# Altium PCB BALL_DROPPER_REV3.PcbDoc (part 2 of 2)
Units mil, origin at the board's own origin, x right, y up, seen from the top; angles counter-clockwise.
Board outline 3260 x 1965 mil, 4 copper layers (Top Layer, Power, GND, Bottom Layer), stack 30.634 mil thick; 128 components, 129 nets, 645 pads, 299 vias.
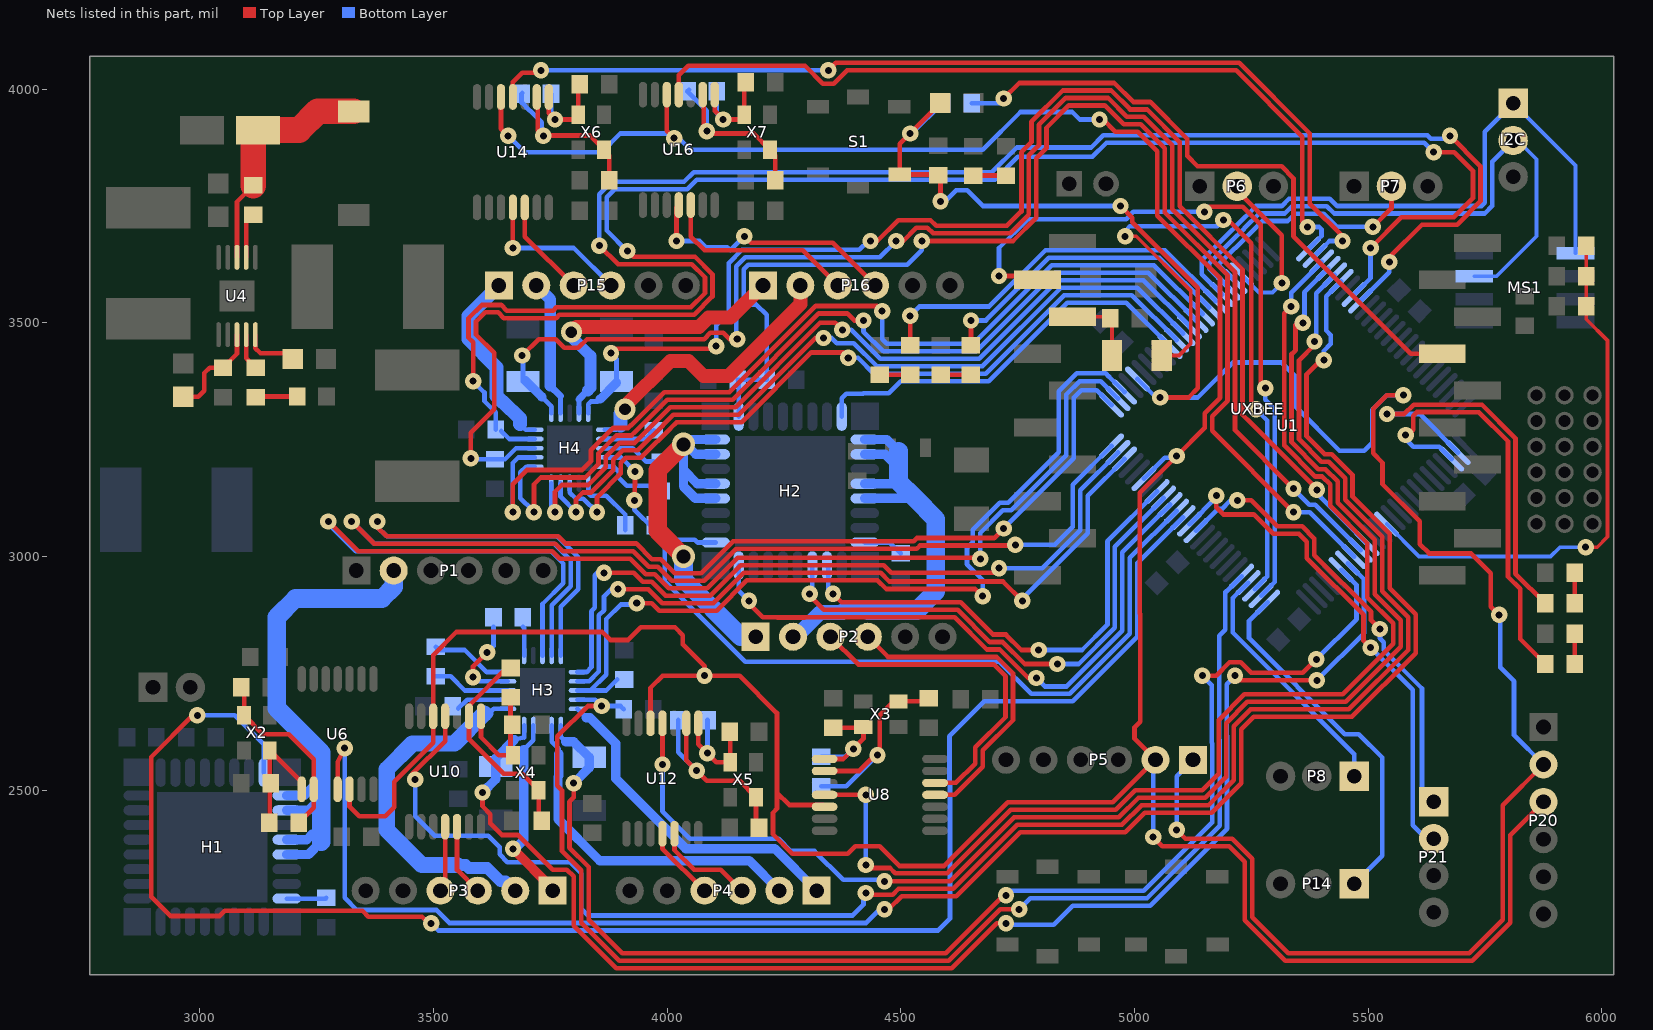
[diagram p4: the nets of this part, all layers, seen from the top]

## Via types
v1: diameter 35, hole 15, Top Layer to Bottom Layer, tented both sides, 211 vias
v2: diameter 19.68, hole 7.87, Top Layer to Bottom Layer, tented both sides, 60 vias
v3: diameter 45, hole 25, Top Layer to Bottom Layer, tented both sides, 9 vias
v4: diameter 60, hole 40, Top Layer to Bottom Layer, tented both sides, 8 vias
v5: diameter 55, hole 35, Top Layer to Bottom Layer, tented both sides, 7 vias
v6: diameter 50, hole 30, Top Layer to Bottom Layer, tented both sides, 2 vias
v7: diameter 135, hole 115, Top Layer to Bottom Layer, 2 vias

## Nets (pads, with @x,y where several pads share a name; then routed paths per layer and width w, separated by ;. In a path a pad name is that pad's centre, name@x,y a point inside that pad or via, vN(x,y) a via of type N, cw(c..) or ccw(c..) an arc to the next point about the centre after c; other vN are vias at no path point) (continued)
MOT1_OUT2: H1.29 H1.30 H1.32 H1.33 P1.2 | length 1145.8
  Bottom Layer w20: H1.33@3186.14,2362.56 3232.56,2362.56 3260,2390 ; H1.32@3186.14,2394.06 3229.06,2394.06 3242.5,2407.5 ; H1.30@3186.14,2457.05 3232.05,2457.05 3260,2485 ; H1.29@3186.14,2488.54 3223.54,2488.54 3255,2520
  Bottom Layer w40: 3260,2390 3260,2485 3260,2580 3165,2675 3165,2870 3205,2910 3390,2910 3415,2935 P1.2@3415,2970
MOT1_SS: U1.56 U6.4 | length 3975.7
  Top Layer w10: U6.4@3295,2501.89 3295,2560 v1(3310,2590) ; v1(4465,2245) 4473.63,2245 4501.63,2273 4618.51,2273 4755.51,2410 4979.69,2410 5021.69,2452 5164.88,2452 5228,2515.12 5228,2630.12 5254.88,2657 5465.19,2657 5601.5,2793.31 5601.5,2876.69 5546,2932.19 5546,3048.75 5466.5,3128.25 5466.5,3174.19 5421.69,3219 5406.51,3219 5368,3257.51 5368,3390 5398,3420 v1(5405,3420)
  Bottom Layer w10: v1(3310,2590) 3310,2270 3336.5,2243.5 3506.8,2243.5 3534.3,2216 4426,2216 4455,2245 v1(4465,2245) ; v1(5405,3420) 5405,3439.7 5420,3454.7 5420,3473.8 5410.24,3483.57 5410.24,3556.74 U1.56@5442.02,3588.52
MOT1_TRI_EN: H1.27 U1.14 | length 3598.1
  Top Layer w10: v1(2995,2660) 2985,2660 2896,2571 2896,2271.63 2936.63,2231 3042.75,2231 3053.75,2242 3348.25,2242 3360.75,2229.5 3475.5,2229.5 3490,2215 v1(3495,2215)
  Bottom Layer w10: v1(2995,2660) 3075,2660 3136.93,2598.07 H1.27@3136.93,2537.76 ; v1(3495,2215) 3510,2200 4580,2200 4605,2225 4605,2513.88 4604,2514.88 4604,2615.12 4678.88,2690 4868.14,2690 5006,2827.86 5006,2986 5103.25,3083.25 U1.14@5103.78,3083.25
MOT2_A: H2.11 U1.15 | length 1646.1
  Bottom Layer w10: H2.11@4103.94,3029.76 4065.24,3029.76 4059,3036 4006,3036 3995,3025 3995,2947.04 4167.04,2775 4710,2775 4779,2706 4861.51,2706 4990,2834.49 4990,2997.3 U1.15@5089.86,3097.17
MOT2_B: H2.3 U1.18 | length 1053.6
  Top Layer w10: v1(4355,2920) 4373,2902 4628.25,2902 4697.25,2833 4724.88,2833 4757.88,2800 v1(4795,2800)
  Bottom Layer w10: H2.3@4342.13,2980.55 4345,2977.68 4345,2930 v1(4355,2920) ; v1(4795,2800) 4887.63,2800 4942,2854.37 4942,3032.82 U1.18@5048.1,3138.92
MOT2_EN: H2.4 U1.17 | length 1132.9
  Top Layer w10: v1(4305,2920) 4305,2916 4335,2886 4621.63,2886 4690.63,2817 4718.25,2817 4765.25,2770 v1(4835,2770)
  Bottom Layer w10: v1(4305,2920) 4310.63,2925.63 H2.4@4310.63,2980.55 ; v1(4835,2770) 4880.25,2770 4958,2847.75 4958,3020.98 U1.17@5062.02,3125
MOT2_ENCA: P2.3 U8.12 | length 726.4
  Top Layer w10: P2.3@4349.29,2828.31 4408.6,2769 4698.37,2769 4724,2743.37 4724,2656.63 4659,2591.63 4659,2556.63 4617.96,2515.59 U8.12@4573.11,2515.59
MOT2_ENCB: P2.4 U8.11 | length 696.8
  Top Layer w10: P2.4@4429.29,2828.31 4472.6,2785 4705,2785 4740,2750 4740,2650 4675,2585 4675,2550 4615,2490 U8.11@4573.11,2490
MOT2_FB: C22.2 H2.20 R7.2 U1.93 | length 2694.6
  Top Layer w10: v1(4545,3675) 4740,3675 4790,3725 4790,3851.7 4811.5,3873.2 4811.5,3916.8 4859.69,3965 4936.62,3965 4977.12,3924.5 5013.38,3924.5 5064.5,3873.38 5064.5,3736.01 5199,3601.51 5199,3333.19 5166,3300.19 5166,3269 v1(5340,3095)
  Bottom Layer w10: H2.20@4153.15,3299.45 4153.15,3375.95 R7.2@4150.79,3378.31 C22.2@4212.8,3378.31 4212.8,3517.2 4191,3539 4170.44,3539 4164,3545.44 4164,3614.56 4173.44,3624 4514,3624 4545,3655 v1(4545,3675) ; v1(5340,3095) 5374.59,3095 U1.93@5469.86,2999.73
MOT2_FS: H2.9 U1.16 | length 1324.4
  Top Layer w10: v1(4175,2905) 4175,2900 4205,2870 4235.55,2870 4236.25,2869.31 4252.31,2869.31 4293.75,2869.31 4294.45,2870 4615,2870 4684,2801 4711.63,2801 4772.63,2740 v1(4790,2740)
  Bottom Layer w10: H2.9@4153.15,2980.55 4153.15,2926.85 v1(4175,2905) ; v1(4790,2740) 4808,2722 4854.88,2722 4974,2841.12 4974,3009 5042.5,3077.5 5042.5,3077.64 U1.16@5075.94,3111.08
MOT2_OUT1: H2.14 H2.15 H2.17 H2.18 P2.1 | length 934.4
  Top Layer w40: v6(4035,3000) 3980,3055 3980,3185 v6(4035,3240)
  Bottom Layer w20: v6@4044.76,3250.24 H2.18@4103.94,3250.24 ; H2.14@4103.94,3124.25 4060.75,3124.25 4035,3150 4035,3185 ; H2.15@4103.94,3155.75 4064.25,3155.75 4035,3185 ; H2.17@4103.94,3218.74 4061.26,3218.74 4035,3245 v6(4035,3240) 4035,3185
  Bottom Layer w40: v6(4035,3000) 4035,2950.88 4157.58,2828.31 P2.1@4189.29,2828.31
MOT2_OUT2: H2.29 H2.30 H2.32 H2.33 P2.2 | length 1021.7
  Bottom Layer w20: H2.33@4422.83,3124.25 4530.75,3124.25 ; H2.32@4422.83,3155.75 4490.75,3155.75 ; H2.30@4422.83,3218.74 4466.26,3218.74 4495,3190 ; H2.29@4422.83,3250.24 4469.76,3250.24 4495,3225
  Bottom Layer w32: P2.2@4269.29,2828.31 4275.75,2828.31 4327.75,2880.31 4370.83,2880.31 4371.14,2880 4375,2880 4379.31,2884.31
  Bottom Layer w35: 4379.31,2884.31 4430,2884.31
  Bottom Layer w40: 4430,2884.31 4534.31,2884.31 4575,2925 4575,3080 4530.75,3124.25 4495,3160 4495,3190 4495,3225
MOT2_SS: U1.53 U8.4 | length 2600.8
  Top Layer w10: U8.4@4336.89,2490 v1(4425,2490) ; v1(4425,2340) 4431.5,2333.5 4476.81,2333.5 4488.31,2322 4599.63,2322 4735.63,2458 4959.81,2458 5001.81,2500 5145,2500 5180,2535 5180,2650 5235,2705 5445.31,2705 5553.5,2813.2 5553.5,2856.8 5498,2912.3 5498,3028.86 5418.5,3108.36 5418.5,3154.3 5401.81,3171 5386.63,3171 5320,3237.63 5320,3520 v1(5335,3535)
  Bottom Layer w10: v1(4425,2340) v1(4425,2490) ; v1(5335,3535) 5335,3564.7 5400.27,3629.96 U1.53@5400.27,3630.28
MOT2_TRI_EN: H2.27 U1.35 | length 865
  Bottom Layer w10: H2.27@4373.62,3299.45 4373.62,3338.62 4383.5,3348.5 4419.19,3348.5 4419.69,3349 4474,3349 4500,3375 4687.88,3375 4855.88,3543 4982.27,3543 U1.35@5075.94,3449.33
MOT3_A: H3.4 U1.25 | length 2574.7
  Top Layer w10: v1(3325,3075) 3373,3027 3760.63,3027 3776.63,3011 3927.83,3011 3960.83,2978 3979.88,2978 4009.88,2948 4079.17,2948 4147.71,3016.54 4534.17,3016.54 4541.13,3023.5 4743.5,3023.5 v1(4745,3025)
  Bottom Layer w10: v1(3325,3075) 3373,3027 3758.61,3027 3794,2991.61 3794,2936.37 3753.03,2895.4 H3.4@3753.03,2788.15 ; v1(4745,3025) 4829.75,3025 4868,3063.25 4868,3153.69 U1.25@4950.67,3236.36
MOT3_B: H3.5 U1.26 | length 2569.8
  Top Layer w10: v1(3380,3075) 3380,3063 3400,3043 3767.25,3043 3782.31,3027.94 3933.52,3027.94 3967.46,2994 3986.51,2994 4016.51,2964 4072.54,2964 4141.08,3032.54 4527.54,3032.54 4534.5,3039.5 4699.5,3039.5 v1(4720,3060)
  Bottom Layer w10: v1(3380,3075) 3380,3063 3400,3043 3765.24,3043 3810,2998.24 3810,2929.75 3772.72,2892.46 H3.5@3772.72,2788.15 ; v1(4720,3060) 4870,3210 4870,3340 4886.03,3356.03 4918.69,3356.03 U1.26@4950.67,3324.05
MOT3_ENCA: P3.3 U10.12 | length 155.3
  Top Layer w10: U10.12@3550.59,2421.89 3550.59,2329.41 P3.3@3595,2285
MOT3_ENCB: P3.4 U10.11 | length 141
  Top Layer w10: P3.4@3515,2285 3525,2295 U10.11@3525,2421.89
MOT3_FB: H3.15 R1.1@3633.35,2550.43 U1.94 | length 2975.7
  Top Layer w10: v1(3605,2495) 3605,2465.45 3621.63,2448.82 3621.63,2428.92 3646.23,2404.31 3680.69,2404.31 3755,2330 3785.56,2330 3800,2315.56 3800,2210 3891.05,2118.95 4608.95,2118.95 4705,2215 v1(4725,2215) ; v1(5215,2745) 5225,2735 v1(5390,2735)
  Bottom Layer w10: 3673.35,2608.35 3693.98,2612.88 H3.15@3693.98,2638.54 ; v1(4725,2215) 4728,2212 4827,2212 4868,2253 5033.25,2253 5198,2417.75 5198,2615.81 5197,2616.81 5197,2727 v1(5215,2745) ; v1(5390,2735) 5491,2836 5491,2950.75 U1.94@5455.94,2985.81
  Bottom Layer w20: v1(3605,2495) 3633.35,2523.35 R1.1@3633.35,2550.43 3633.35,2568.35 3673.35,2608.35
MOT3_FS: H3.8 R3.2@3908.35,2736.85 U1.28 | length 1845.6
  Top Layer w10: v1(3935,2900) 3967.37,2900 3983.37,2884 4105.68,2884 4170.68,2949 4450,2949 4468.5,2930.5 4659.5,2930.5 v1(4675,2915)
  Bottom Layer w10: H3.8@3808.15,2713.35 3869.84,2713.35 R3.2@3893.35,2736.85 ; 3835.97,2713.35 3870,2747.37 3870,2866.25 3900.94,2897.19 3932.19,2897.19 v1(3935,2900) ; v1(4675,2915) 4675,2949.7 4641.5,2983.2 4641.5,3017.5 4654,3030 4654,3056.93 4711.88,3114.81 4729.56,3114.81 4838,3223.25 4838,3353.25 4876.75,3392 4938,3392 4945,3385 4945.4,3385 U1.28@4978.51,3351.89
MOT3_OUT1: H3.14 P3.1 | length 404.5
  Top Layer w20: v1(3670.2,2374.5) P3.1@3755,2289.7
  Bottom Layer w10: 3693.35,2586.92 3713.66,2607.24 H3.14@3713.66,2638.54
  Bottom Layer w20: v1(3670.2,2374.5) 3674.5,2374.5 3693.35,2393.35 3693.35,2586.92
MOT3_OUT2: H3.16 P3.2 | length 770.9
  Bottom Layer w10: 3618.35,2663.35 3628.98,2673.98 H3.16@3658.54,2673.98
  Bottom Layer w20: 3608.35,2663.35 3618.35,2663.35
  Bottom Layer w25: 3550,2340 3569.09,2340 3575.59,2333.5 3615.09,2333.5 3643.5,2305.09 3643.5,2305 3655,2305 P3.2@3675,2285
  Bottom Layer w35: 3550,2340 3475,2340 3400,2415 3400,2545 3455,2600 3545,2600 3608.35,2663.35
MOT3_SS: U1.55 U10.4 | length 3768.2
  Top Layer w10: v1(3460.84,2522.91) 3455,2528.75 3455,2534.75 3525,2604.75 U10.4@3525,2658.11 ; v1(4425,2280) 4428.5,2276.5 4482.5,2276.5 4495,2289 4611.88,2289 4748.88,2426 4973.07,2426 5015.07,2468 5158.25,2468 5212,2521.75 5212,2636.75 5248.25,2673 5458.56,2673 5585.5,2799.94 5585.5,2870.06 5530,2925.56 5530,3042.12 5450.5,3121.62 5450.5,3167.56 5415.06,3203 5399.88,3203 5352,3250.88 5352,3420 5385,3453 v1(5385,3460)
  Bottom Layer w10: v1(3460.84,2522.91) 3460.84,2444.16 3502.38,2402.62 3617.38,2402.62 3641.7,2378.3 3641.7,2362.69 3658.39,2346 3682,2346 3792.18,2346 3816,2322.18 3816,2246.63 3830.63,2232 4397,2232 4420,2255 4420,2275 v1(4425,2280) ; v1(5385,3460) 5388.5,3463.5 5388.5,3562.84 U1.55@5428.1,3602.44
MOT4_A: H3.6 U1.24 | length 1566.1
  Top Layer w10: v1(3865,2965) 3928.58,2965 3947.58,2946 3966.63,2946 3996.63,2916 4092.42,2916 4157.42,2981 4463.25,2981 4479.25,2965 4700,2965 v1(4710,2975)
  Bottom Layer w10: H3.6@3808.15,2752.72 3827.72,2752.72 3838,2763 3838,2883 3845,2890 3845,2960 3850,2965 v1(3865,2965) ; v1(4710,2975) 4802.37,2975 4884,3056.63 4884,3141.85 U1.24@4964.59,3222.44
MOT4_B: H3.7 U1.23 | length 1579.5
  Top Layer w10: v1(3895,2930) 3960,2930 3990,2900 4099.05,2900 4164.05,2965 4456.63,2965 4475.13,2946.5 4718.5,2946.5 v1(4760,2905)
  Bottom Layer w10: H3.7@3808.15,2733.03 3833.03,2733.03 3854,2754 3854,2874 3865,2885 3865,2915 3880,2930 v1(3895,2930) ; v1(4760,2905) 4760,2910 4900,3050 4900,3130.01 U1.23@4978.51,3208.52
MOT4_ENCA: P4.3 U12.12 | length 215.3
  Top Layer w10: U12.12@4015.59,2406.89 4015.59,2372.04 4057.63,2330 4115,2330 P4.3@4160,2285
MOT4_ENCB: P4.4 U12.11 | length 159.2
  Top Layer w10: U12.11@3990,2406.89 3990,2375 P4.4@4080,2285
MOT4_FB: H3.11 R2.1@3833.35,2570.43 U1.95 | length 2811.7
  Top Layer w10: v1(3800,2515) 3800,2484.45 3791,2475.45 3791,2376.63 3832,2335.63 3832,2223.25 3904.3,2150.95 4595.7,2150.95 4719.75,2275 v1(4725,2275) ; v1(5145,2745) 5174.69,2745 5203.19,2773.5 5226.81,2773.5 5249.31,2751 5360,2751 v1(5389,2780)
  Bottom Layer w10: H3.11@3772.72,2638.54 3772.72,2613.98 3783.35,2603.35 ; v1(4725,2275) 4725,2285 5020,2285 5166,2431 5166,2600.56 5165,2601.56 5165,2725 v1(5145,2745) ; v1(5389,2780) 5475,2866 5475,2938.91 U1.95@5442.02,2971.89
  Bottom Layer w20: 3783.35,2603.35 3800.43,2603.35 R2.1@3833.35,2570.43 3833.35,2548.35 v1(3800,2515)
MOT4_FS: H3.9 R4.2@3906.85,2673.35 U1.5 | length 2722.8
  Top Layer w10: v1(3860,2680) 3830,2680 3765,2615 3765,2509.7 3775,2499.7 3775,2370 3816,2329 3816,2216.63 3897.67,2134.95 4602.33,2134.95 4712.36,2244.98 v1(4753,2244.98)
  Bottom Layer w10: H3.9@3808.15,2693.66 3846.34,2693.66 v1(3860,2680) 3900.2,2680 R4.2@3906.85,2673.35 ; v1(4753,2244.98) 4777.02,2269 5026.63,2269 5182,2424.37 5182,2608.18 5181,2609.18 5181,2830.49 5194,2843.49 5194,2924 5195,2925 5196.09,2925 U1.5@5229.06,2957.97
MOT4_OUT1: H3.10 P4.1 | length 716.9
  Bottom Layer w10: H3.10@3808.15,2673.98 3827.13,2655
  Bottom Layer w20: 3827.13,2655 3835,2655 3890,2600 3890,2525 4040,2375 4230,2375 P4.1@4320,2285
MOT4_OUT2: H3.12 P4.2 | length 744.2
  Bottom Layer w10: H3.12@3753.03,2638.54 3753.03,2603.96 3768.35,2588.65 3768.35,2578.35
  Bottom Layer w20: 3768.35,2578.35 3768.35,2530.72 3766.5,2528.88 3766.5,2438.5 3856,2349 4176,2349 P4.2@4240,2285
MOT4_SS: U1.54 U12.4 | length 3069.2
  Top Layer w10: v1(3990,2555) U12.4@3990,2643.11 ; v1(4465,2305) 4605.25,2305 4742.25,2442 4966.44,2442 5008.44,2484 5151.63,2484 5196,2528.37 5196,2643.37 5241.63,2689 5451.93,2689 5569.5,2806.57 5569.5,2863.43 5514,2918.93 5514,3035.49 5434.5,3114.99 5434.5,3160.93 5408.43,3187 5393.25,3187 5336,3244.25 5336,3433.07 5344.5,3441.57 5344.5,3495.43 5349.07,3500 v1(5360,3500) v1@5370,3500
  Bottom Layer w10: v1(3990,2555) 3990,2454.7 4048.7,2396 4238.7,2396 4264.85,2369.85 4315.15,2369.85 4376.5,2308.5 4461.5,2308.5 v1(4465,2305) ; v1(5360,3500) 5363.5,3503.5 5363.5,3565.68 U1.54@5414.18,3616.36
MOT5_A: H4.4 U1.37 | length 1693
  Top Layer w10: v1(3805,3095) 3805,3122 3820,3137 3837.66,3137 3885,3184.34 3885,3207.12 3904.88,3227 3937,3227 3943.5,3233.5 3943.76,3233.5 3991.5,3281.24 3991.5,3281.5 4013.5,3303.5 4153.15,3303.5 4317,3467.34 v1(4334.67,3467.34)
  Bottom Layer w10: H4.4@3771.97,3156.85 3771.97,3128.03 v1(3805,3095) ; v1(4334.67,3467.34) 4352.35,3467.34 4363.19,3456.5 4399.5,3456.5 4449,3407 4674.63,3407 4842.63,3575 5005.95,3575 U1.37@5103.78,3477.17
MOT5_B: H4.5 U1.38 | length 1782.8
  Top Layer w10: v1(3760,3095) 3760,3138 3775,3153 3831.04,3153 3869,3190.96 3869,3213.75 3898.25,3243 3930.37,3243 3936.87,3249.5 3937.13,3249.5 3975.5,3287.87 3975.5,3288.13 4006.87,3319.5 4146.52,3319.5 4327.02,3500 4360,3500 v1(4375,3485)
  Bottom Layer w10: v1@3750,3095 v1(3760,3095) 3752.28,3102.72 H4.5@3752.28,3156.85 ; v1(4375,3485) 4393.63,3485 4455.63,3423 4668,3423 4836,3591 5019,3591 5117.7,3492.3 U1.38@5117.7,3491.09
MOT5_ENCA: P15.3 U14.12 | length 210.1
  Top Layer w10: U14.12@3695.59,3746.89 3695.59,3684.41 P15.3@3800,3580
MOT5_ENCB: P15.4 U14.11 | length 330
  Top Layer w10: v1(3670,3660) U14.11@3670,3746.89
  Bottom Layer w10: v1(3670,3660) 3800,3660 P15.4@3880,3580
MOT5_FB: H4.11 R2.1@3691.65,3374.57 U1.92 | length 3085.3
  Top Layer w10: v1(3690,3430) 3725,3465 3761.5,3465 3780,3446.5 3810,3446.5 3828.5,3465 4079.15,3465 4092.65,3478.5 4120,3478.5 4133.5,3465 v1(4150,3465) ; v1(4490,3675) 4504.69,3675 4533.19,3703.5 4556.81,3703.5 4568.99,3691.31 4733.69,3691.31 4774,3731.63 4774,3858.32 4795.5,3879.82 4795.5,3923.43 4853.07,3981 4943.25,3981 4983.75,3940.5 5020.01,3940.5 5080.5,3880.01 5080.5,3742.64 5215,3608.14 5215,3270 v1(5340,3145)
  Bottom Layer w10: v1(3690,3430) 3691.65,3428.35 R2.1@3691.65,3374.57 ; 3731.65,3341.65 3752.28,3321.02 H4.11@3752.28,3306.46 ; v1(4150,3465) 4148,3463 4148,3621.18 4166.82,3640 4455,3640 v1(4490,3675) ; v1(5340,3145) 5374,3111 5386.43,3111 U1.92@5483.78,3013.65
  Bottom Layer w19.68: R2.1@3696.65,3376.65 3731.65,3341.65
MOT5_FS: H4.8 R3.2@3631.65,3208.15 U1.58 | length 3759.7
  Top Layer w10: v1(3580,3210) 3580,3265 3630,3315 3630,3435.93 3591.07,3474.86 3591.07,3502.62 3610.69,3522.24 3638.44,3522.24 3650.68,3510 3762.62,3510 3769.62,3517 4057.61,3517 4097,3556.39 4097,3603.61 4059.61,3641 3927.5,3641 v1(3915,3653.5) ; v1(5505,3660) 5571,3726 5683.37,3726 5724,3766.63 5724,3825 5684,3865 v1(5640,3865)
  Bottom Layer w10: v1(3580,3210) 3581.85,3208.15 R3.2@3631.65,3208.15 3653.15,3208.15 3676.65,3231.65 H4.8@3716.85,3231.65 ; v1(3915,3653.5) 3871,3697.5 3871,3768.37 3888.13,3785.5 4042.75,3785.5 4063.25,3806 4701.51,3806 4750.51,3855 4910,3855 4940,3885 5620,3885 v1(5640,3865) ; U1.58@5469.86,3560.68 5505,3595.82 v1(5505,3660)
MOT5_OUT1: H4.10 P15.1 | length 407
  Bottom Layer w10: 3685,3283.31 3697.28,3271.02 H4.10@3716.85,3271.02
  Bottom Layer w30: P15.1@3640,3580 3575,3515 3575,3465 3635.22,3404.78 3635.22,3343.23 3647.52,3330.93 3649.07,3330.93 3685,3295 3685,3283.31
MOT5_OUT2: H4.12 P15.2 | length 295.1
  Bottom Layer w10: H4.12@3771.97,3306.46 3771.97,3343.03
  Bottom Layer w15: 3750,3365 3771.97,3343.03
  Bottom Layer w25: P15.2@3720,3580 3750,3550 3750,3365
MOT5_SS: U1.52 U14.4 | length 2146.9
  Top Layer w10: U14.4@3670,3983.11 3670,4015 3690,4035 3725,4035 v1(3730,4040) ; v1(4344.85,4040.15) 4345.15,4040.15 4361.05,4056.05 5223.95,4056.05 5375,3905 5375,3755 5445,3685 v1(5445,3675)
  Bottom Layer w10: v1(3730,4040) 4010,4040 4010.15,4040.15 v1(4344.85,4040.15) ; U1.52@5386.35,3644.2 5417.15,3675 v1(5445,3675)
MOT6_A: H4.6 U1.39 | length 1952.4
  Top Layer w10: v1(3715,3095) 3715,3154 3730,3169 3824.41,3169 3853,3197.59 3853,3220.37 3891.63,3259 3923.75,3259 3930.25,3265.5 3930.5,3265.5 3959.5,3294.5 3959.5,3294.75 4000.25,3335.5 4139.9,3335.5 4324.4,3520 4385,3520 4400,3505 v1(4420,3505)
  Bottom Layer w10: v1(3715,3095) 3720,3095 3725,3100 3711,3100 3686,3125 3686,3180 3698.28,3192.28 H4.6@3716.85,3192.28 ; v1(4420,3505) 4420,3481.25 4462.25,3439 4661.37,3439 4829.37,3607 5029.62,3607 U1.39@5131.62,3505
MOT6_B: H4.7 U1.40 | length 2045.1
  Top Layer w10: v1(3670,3095) 3670,3155 3700,3185 3817.78,3185 3837,3204.22 3837,3227 3885,3275 3917.12,3275 3923.62,3281.5 3923.88,3281.5 3943.5,3301.12 3943.5,3301.38 3993.62,3351.5 4133.27,3351.5 4317.77,3536 4449,3536 v1(4460,3525)
  Bottom Layer w10: v1(3670,3095) 3670,3200 3681.97,3211.97 H4.7@3716.85,3211.97 ; v1(4460,3525) 4460,3465 4470,3455 4654.75,3455 4822.75,3623 5041.46,3623 U1.40@5145.54,3518.92
MOT6_ENCA: P16.3 U16.12 | length 425.1
  Top Layer w10: U16.12@4050.59,3751.89 4050.59,3684.41 4080,3655 4290,3655 P16.3@4365,3580
MOT6_ENCB: P16.4 U16.11 | length 568.2
  Top Layer w10: v1(4020,3675) 4020,3746.89 U16.11@4025,3751.89 ; v1(4165,3685) 4179,3671 4354,3671 P16.4@4445,3580
  Bottom Layer w10: v1(4020,3675) 4069.7,3675 4083.2,3661.5 4128.5,3661.5 4135,3655 v1(4165,3685)
MOT6_FB: H4.15 R1.1@3891.65,3374.57 U1.91 | length 2886.8
  Top Layer w10: v1(3880,3435) 3889.5,3444.5 4099.5,3444.5 v1(4105,3450) v1@4101.22,3450 ; v1(4435,3675) 4449.69,3675 4494.19,3719.5 4563.43,3719.5 4575.62,3707.31 4727.06,3707.31 4758,3738.25 4758,3864.95 4779.5,3886.45 4779.5,3930.06 4846.44,3997 4949.87,3997 4990.37,3956.5 5026.64,3956.5 5096.5,3886.64 5096.5,3749.26 5231,3614.76 5231,3303.7 5248.19,3286.5 5248.5,3286.5 5390,3145 v1(5390,3142.5)
  Bottom Layer w10: H4.15@3831.02,3306.46 3831.02,3326.02 3836.5,3331.5 3851.5,3331.5 3856.65,3336.65 ; v1(3880,3435) 3891.65,3423.35 R1.1@3891.65,3374.57 ; v1(4105,3450) 4105,3495 4132,3522 4132,3627.81 4160.19,3656 4411,3656 4430,3675 v1(4435,3675) ; v1(5390,3142.5) 5390,3135.27 U1.91@5497.7,3027.57
  Bottom Layer w19.68: 3856.65,3336.65 R1.1@3891.65,3371.65
MOT6_FS: H4.9 R4.2@3633.15,3271.65 U1.59 | length 3685.4
  Top Layer w10: v1(3585,3375) 3585,3458.3 3575.07,3468.24 3575.07,3509.24 3604.06,3538.24 3645.07,3538.24 3657.31,3526 3756,3526 3763,3533 4050.98,3533 4081,3563.02 4081,3596.98 4052.98,3625 3895,3625 v1(3855,3665) ; v1(5545,3630) 5545,3640 5615,3710 5690,3710 5740,3760 5740,3835 v1(5675,3900)
  Bottom Layer w10: v1(3585,3375) 3609.22,3350.78 3609.22,3332.46 3633.15,3308.53 R4.2@3633.15,3271.65 ; R4.2@3644.9,3268.41 3661.97,3251.34 H4.9@3716.85,3251.34 ; v1(3855,3665) 3855,3775 3881.5,3801.5 4036.13,3801.5 4056.63,3822 4694.88,3822 4747.88,3875 4907.37,3875 4933.37,3901 5626.63,3901 5634.13,3893.5 5668.5,3893.5 v1(5675,3900) ; U1.59@5483.78,3546.76 5545,3607.98 v1(5545,3630)
MOT6_OUT1: H4.14 P16.1 | length 652.2
  Top Layer w30: v3(3795,3480) 3806,3491 4068.38,3491 4088.42,3511.04 4136.04,3511.04 P16.1@4205,3580
  Bottom Layer w10: H4.14@3811.34,3306.46 3811.34,3336.34
  Bottom Layer w15: 3811.34,3336.34 3830,3355
  Bottom Layer w25: v3(3795,3480) 3795,3470 3836,3429 3836,3361 3830,3355
MOT6_OUT2: H4.16 P16.2 | length 614.9
  Top Layer w30: v3(3910,3315) 3910,3321.52 4006.98,3418.5 4045.95,3418.5 4077.95,3386.5 4131.5,3386.5 4285,3540 P16.2@4285,3580
  Bottom Layer w10: H4.16@3866.46,3271.02 3891.02,3271.02 3900,3280
  Bottom Layer w30: 3900,3280 3900,3305 v3(3910,3315)
MOT6_SS: U1.51 U16.4 | length 1754.1
  Top Layer w10: U16.4@4025,3988.11 4025,4030 4045,4050 4295,4050 4295,4049.7 4333.19,4011.5 4356.5,4011.5 4385,4040 5217.37,4040 5359,3898.37 5359,3716 v1(5370,3705)
  Bottom Layer w10: v1(5370,3705) 5395,3705 5400,3700 5400,3685.69 U1.51@5372.43,3658.12
MOT34_EN: H3.3 U1.27 | length 2816.4
  Top Layer w10: v1(3275,3075) 3339,3011 3754,3011 3770,2995 3921.21,2995 3954.21,2962 3973.25,2962 4003.25,2932 4085.79,2932 4150.79,2997 4668,2997 v1(4670,2995)
  Bottom Layer w10: v1(3275,3075) 3275,3070 3334,3011 3751.98,3011 3778,2984.98 3778,2943 3733.35,2898.35 H3.3@3733.35,2788.15 ; v1(4670,2995) 4670,3050.3 4718.51,3098.81 4736.19,3098.81 4854,3216.63 4854,3346.63 4882.37,3375 4927.56,3375 U1.27@4964.59,3337.97
MOT56_EN: H4.3 U1.36 | length 1637.8
  Top Layer w10: v1(3850,3095) 3850,3126.71 3901,3177.71 3901,3200.49 3911.51,3211 3943.63,3211 3950.13,3217.5 3950.39,3217.5 4007.5,3274.61 4007.5,3274.87 4020.13,3287.5 4159.78,3287.5 4308.78,3436.5 4376.5,3436.5 4387.5,3425.5 v1(4387.5,3425)
  Bottom Layer w10: H4.3@3791.65,3156.85 3791.65,3136.85 3805,3123.5 3820.68,3123.5 v1@3850,3094.18 ; v1(4387.5,3425) 4408.37,3425 4442.37,3391 4681.25,3391 4849.25,3559 4994.11,3559 U1.36@5089.86,3463.25
NetC4_1: C4.1@3114.68,3730.83 U4.2 | length 97.2
  Top Layer w10: U4.2@3099.37,3640 3099.37,3715.51 C4.1@3114.68,3730.83
NetC4_2: C4.2@3114.68,3793.82 D2.2 L1.2 U4.3 | length 512.5
  Top Layer w10: U4.3@3079.68,3640 3079.68,3758.82 C4.2@3114.68,3793.82
  Top Layer w55: C4.2@3114.68,3793.82 3114.68,3902.28 D2.2@3124.72,3912.32 3212.32,3912.32 3252.32,3952.32 L1.2@3329.68,3952.32
NetC6_2: C6.2 R2.1@3119.68,3340.83 | length 87
  Top Layer w10: R2.1@3121.18,3342.32 C6.2@3208.19,3342.32
NetC21_2: C21.2 H1.36 | length 85.5
  Bottom Layer w10: H1.36@3186.14,2268.07 3269.17,2268.07 C21.2@3270.91,2269.8
NetC25_2: C25.2 H2.36 | length 86.8
  Bottom Layer w10: H2.36@4422.83,3029.76 4476.73,3029.76 C25.2@4500,3006.5
NetC35_1: C35.1 R61.1 U6.2 X2.4 | length 399.9
  Top Layer w10: C35.1@3088.5,2720 3095,2713.5 X2.4@3095,2660 3135,2620 3190,2620 3243.82,2566.18 U6.2@3243.82,2501.89 3243.82,2462.32 R61.1@3211.5,2430
NetC36_1: C36.1 R61.2 U6.1 X2.2 | length 264.9
  Top Layer w10: R61.2@3150,2431.5 X2.2@3150,2585 3218.23,2516.77 U6.1@3218.23,2501.89
NetC37_1: C37.1 R62.1 U8.2 X3.4 | length 478.9
  Top Layer w10: U8.2@4336.89,2541.18 4411.18,2541.18 4455,2585 4455,2660 4485,2690 X3.4@4495,2690 4553.5,2690 C37.1@4560,2696.5
  Bottom Layer w10: R62.1@4330,2508.5 4383.5,2508.5 v1(4450,2575)
NetC38_1: C38.1 R62.2 U8.1 X3.2 | length 267
  Top Layer w10: U8.1@4336.89,2566.77 4376.77,2566.77 v1(4398.39,2588.39) 4420,2610 X3.2@4420,2635 4418.5,2633.5 C38.1@4355,2633.5
  Bottom Layer w10: R62.2@4330,2571.5 4381.5,2571.5 v1(4398.39,2588.39)
NetC39_1: C39.1 R63.1 U10.2 X4.4 | length 446.8
  Top Layer w10: R63.1@3665,2761.5 3656.5,2761.5 3576.18,2681.18 U10.2@3576.18,2658.11 3576.18,2608.82 3650,2535 3690,2535 X4.4@3725,2500 C39.1@3725,2441.5
NetC40_1: C40.1 R63.2 U10.1 X4.2 | length 247.4
  Top Layer w10: U10.1@3601.77,2658.11 3601.77,2613.23 3640,2575 X4.2@3670,2575 ; X4.2@3665,2580 R63.2@3665,2698.5
NetC41_1: C41.1 R64.1 U12.2 X5.4 | length 452.9
  Top Layer w10: U12.2@4041.18,2643.11 4041.18,2563.82 4085,2520 4155,2520 X5.4@4190,2485 4190,2426.5 C41.1@4196.5,2420
  Bottom Layer w10: R64.1@4023.5,2650 4023.5,2581.5 v1(4063.09,2541.91)
NetC42_1: C42.1 R64.2 U12.1 X5.2 | length 265.7
  Top Layer w10: U12.1@4066.77,2643.11 4066.77,2598.23 4105,2560 X5.2@4135,2560 4135,2623.5 C42.1@4133.5,2625
  Bottom Layer w10: v1(4085.89,2579.11) 4086.5,2579.72 R64.2@4086.5,2650
NetC56_1: C56.1 R65.1 U14.2 X6.4 | length 412.2
  Top Layer w10: U14.2@3721.18,3983.11 3723.5,3980.79 3723.5,3911.5 v1(3735,3900) ; v1@3735.69,3900.69 3834.31,3900.69 X6.4@3865,3870 3876.5,3858.5 C56.1@3876.5,3805
  Bottom Layer w10: R65.1@3690,3991.5 R65.1@3688.5,3990 3688.5,3971.5 3706.5,3953.5 3706.8,3953.5 3731.5,3928.8 3731.5,3903.5 v1(3735,3900)
NetC57_1: C57.1 R65.2 U14.1 X6.2 | length 244.4
  Top Layer w10: U14.1@3745,3984.88 U14.1@3746.77,3983.11 3746.77,3948.23 v1(3760,3935) 3800,3935 X6.2@3810,3945 3810,4006.5 C57.1@3813.5,4010
  Bottom Layer w10: R65.2@3745,3996.5 R65.2@3751.5,3990 3751.5,3943.5 v1(3760,3935)
NetC58_1: C58.1 R66.1 U16.2 X7.4 | length 409.9
  Top Layer w10: U16.2@4076.18,3988.11 4078.5,3985.79 4078.5,3916.5 v1(4085,3910) 4090,3905 4185,3905 X7.4@4220,3870 4231.5,3858.5 C58.1@4231.5,3805
  Bottom Layer w10: R66.1@4046.77,3998.27 R66.1@4043.5,3995 4085,3953.5 v1(4085,3910)
NetC59_1: C59.1 R66.2 U16.1 X7.2 | length 253.5
  Top Layer w10: U16.1@4101.77,3988.11 4101.77,3953.23 v1(4120,3935) 4155,3935 X7.2@4165,3945 4165,4011.5 C59.1@4168.5,4015
  Bottom Layer w10: R66.2@4101.77,3999.72 R66.2@4106.5,3995 4106.5,3948.5 v1(4120,3935)
NetD1_1: D1.1 R1.1@4948.5,3510 UXBEE.3 | length 163.6
  Top Layer w8: UXBEE.3@4867.5,3513 4945.5,3513 R1.1@4948.5,3510 4951.85,3506.65 D1.1@4951.85,3430
NetD3_1: D3.1 R24.2 | length 70.8
  Top Layer w10: R24.2@4655,3815 4723.03,3815 D3.1@4725,3813.03
NetD4_1: D4.1 R20.2 | length 65
  Top Layer w10: D4.1@4585,3388.5 R20.2@4650,3388.5
NetD5_1: D5.1 R21.2 | length 65
  Top Layer w10: D5.1@4455,3388.5 R21.2@4520,3388.5
NetD6_2: D6.2 R22.1 | length 65
  Top Layer w10: R22.1@5941.5,2770 D6.2@5941.5,2835
NetD7_2: D7.2 R23.1 | length 65
  Top Layer w10: R23.1@5941.5,2900 D7.2@5941.5,2965
NetH3_1: C1.2@3691.5,2870 H3.1 | length 62.9
  Bottom Layer w10: 3691.5,2850 3693.98,2847.52 H3.1@3693.98,2788.15
NetH3_17: C3.2@3541.5,2680 H3.17 | length 113
  Bottom Layer w10: C3.2@3553.35,2674.84 3572.17,2693.66 H3.17@3658.54,2693.66
NetH3_18: C2.2@3505,2743.5 H3.18 | length 166
  Bottom Layer w10: C2.2@3505,2743.5 3536.69,2743.5 3566.85,2713.35 H3.18@3658.54,2713.35
NetH3_19: C1.1@3628.5,2870 H3.19 | length 224.2
  Top Layer w10: v1(3584.54,2741.85) 3584.54,2764.54 v1(3615,2795) v1@3615,2805
  Bottom Layer w10: v1@3583.35,2743.04 v1(3584.54,2741.85) 3589.85,2741.85 3598.66,2733.03 H3.19@3658.54,2733.03 ; v1@3615,2803.5 v1(3615,2795) 3628.5,2808.5 3628.5,2850
NetH3_20: C2.1@3505,2806.5 H3.20 | length 175.8
  Bottom Layer w10: C2.1@3505,2806.5 3511.5,2800 3566.69,2800 3613.98,2752.72 H3.20@3658.54,2752.72
NetH4_1: C1.2@3910.16,3066.65 H4.1 | length 152.4
  Bottom Layer w10: H4.1@3831.02,3156.85 3831.02,3135.79 3836.81,3130 3870,3130 3910.16,3089.84 C1.2@3910.16,3056.65
NetH4_17: C3.2@3971.65,3270.16 H4.17 | length 113
  Bottom Layer w10: H4.17@3866.46,3251.34 3952.83,3251.34 C3.2@3971.65,3270.16
NetH4_18: C2.2@3986.65,3203.15 H4.18 | length 117
  Bottom Layer w10: H4.18@3866.46,3231.65 3926.65,3231.65 3955.16,3203.15 C2.2@3971.65,3203.15
NetH4_19: C1.1@3973.15,3066.65 H4.19 | length 220.6
  Top Layer w10: v1(3930,3120) v1(3931.65,3181.65)
  Bottom Layer w10: H4.19@3866.46,3211.97 3901.34,3211.97 v1(3931.65,3181.65) ; v1(3930,3120) 3930,3099.8 C1.1@3973.15,3056.65
NetH4_20: C2.1@3986.65,3140.16 H4.20 | length 132.5
  Bottom Layer w10: H4.20@3866.46,3192.28 3886.02,3192.28 3896.65,3181.65 3896.65,3168.35 3913.35,3151.65 3965.16,3151.65 ; 3965.16,3146.65 C2.1@3971.65,3140.16
NetR2_2: R2.2@3119.68,3403.82 U4.9 | length 79.2
  Top Layer w10: U4.9@3099.37,3474.65 3099.37,3424.13 R2.2@3119.68,3403.82
NetR3_2: R3.2@3049.68,3403.82 R4.1@2964.68,3341.89 U4.8 | length 216
  Top Layer w10: R4.1@2964.68,3341.89 2996.89,3341.89 3010,3355 3010,3392.64 3021.18,3403.82 R3.2@3049.68,3403.82 3079.68,3433.82 U4.8@3079.68,3474.65
NetR5_1: R5.1 U4.10 | length 118.7
  Top Layer w10: U4.10@3119.06,3474.65 3119.06,3445.94 3130,3435 3186.57,3435 R5.1@3199.25,3422.32
NetR20_1: R20.1 U1.41 | length 662.4
  Top Layer w10: R20.1@4650,3451.5 v1(4650,3505)
  Bottom Layer w10: v1(4650,3505) 4682.12,3505 4816.12,3639 5053.3,3639 U1.41@5159.46,3532.84
NetR21_1: R21.1 U1.42 | length 819.7
  Top Layer w10: R21.1@4520,3451.5 v1(4520,3515)
  Bottom Layer w10: v1(4520,3515) 4540,3535 4689.49,3535 4809.49,3655 5065.14,3655 U1.42@5173.38,3546.76
NetR22_2: R22.2 U1.78 | length 924.4
  Top Layer w10: v1(5580,3260) 5580,3255 5596,3271 5596,3301 5604,3309 5671.98,3309 5672.48,3308.5 5736.81,3308.5 5799,3246.3 5799,2956.88 5825,2930.88 5825,2823.5 R22.2@5878.5,2770
  Bottom Layer w10: v1(5580,3260) 5580,3251 5596,3235 5652.17,3235 U1.78@5678.65,3208.52
NetR23_2: R23.2 U1.77 | length 879.1
  Top Layer w10: v1(5540,3305) 5577.37,3305 5597.37,3325 5678.61,3325 5679.11,3324.5 5743.43,3324.5 5815,3252.93 5815,2963.5 R23.2@5878.5,2900
  Bottom Layer w10: v1(5540,3305) 5610.01,3305 U1.77@5692.57,3222.44
NetR26_1: R26.1 UXBEE.17 | length 1359
  Top Layer w10: v1(4720,3980) 4753,4013 4956.5,4013 4997,3972.5 5033.26,3972.5 5112.5,3893.26 5112.5,3857 5134.68,3834.82 5314.77,3834.82 5340,3809.59 5340,3685 5591,3434 UXBEE.17@5658.62,3434
  Bottom Layer w10: R26.1@4651.5,3970 4710,3970 v1(4720,3980)
PWM1: P8.1 U1.4 | length 535.4
  Bottom Layer w10: U1.4@5242.98,2944.05 5210.68,2911.76 5210.68,2910.68 5210,2910 5210,2837.37 5470,2577.37 P8.1@5470,2530
PWM2: P14.1 U1.1 | length 779.2
  Bottom Layer w10: U1.1@5284.73,2902.29 5245,2862.56 5245,2825 5450,2620 5480,2620 5530,2570 5530,2360 P14.1@5470,2300
RESET: C9.2 P5.1 P20.2 R25.1 R26.2 S1.3 U1.30 | length 4686.6
  Top Layer w10: C9.2@4584.57,3970 4497.69,3883.12 S1.3@4497.69,3817.32 4578.19,3817.32 R25.1@4579.69,3815.83 4585,3810.51 v1(4585,3760) ; v1(4970,3750) 4995,3725 4995,3715 5135,3575 5135,3359.7 5115.46,3340.15 v1(5054.85,3340.15) ; v1(5090,2415) 5109,2396 5209.25,2396 5252,2353.25 5252,2228.25 5329.3,2150.95 5715.7,2150.95 5788,2223.25 5788,2468 P20.2@5875,2555 ; v1(5575,3345) 5539.69,3345 5510.5,3315.81 5510.5,3220.7 5530.5,3200.7 5530.5,3154.75 5610,3075.25 5610,3026.63 5630.13,3006.5 5719.81,3006.5 5762.31,2963.99 5762.31,2892.69 v1(5780,2875)
  Bottom Layer w10: v1(4520,3905) 4523.5,3905 R26.2@4588.5,3970 ; v1(4585,3760) 4594.69,3760 4618.19,3783.5 4641.81,3783.5 4675.31,3750 v1(4970,3750) ; U1.30@5006.35,3379.73 5045.92,3340.15 v1(5054.85,3340.15) 5135.15,3340.15 5210,3415 5315,3415 5345,3385 5345,3320 5438.5,3226.5 5491.81,3226.5 5508.5,3243.2 5508.5,3313.8 5539.69,3345 v1(5575,3345) ; v1(5090,2415) 5090,2530 P5.1@5125,2565 ; v1(5780,2875) 5782.63,2872.37 5782.63,2762.63 5812,2733.25 5812,2618 P20.2@5875,2555
RX0: U1.2 UXBEE.2 | length 1576.7
  Top Layer w10: v1(4710,3600) 4784.5,3600 UXBEE.2@4792.5,3592 ; v1(5149.34,3737.33) 5160.52,3748.5 5231.5,3748.5 5270,3710 5270,3370 v1(5280,3360)
  Bottom Layer w10: v1(4710,3600) 4710,3660 4771.5,3721.5 4981.81,3721.5 4997.63,3737.33 v1(5149.34,3737.33) ; U1.2@5270.81,2916.21 5300,2945.4 5300,3315.3 5280,3335.3 v1(5280,3360)
RX1: P21.1 U1.12 | length 982.7
  Top Layer w10: v1(5220,3120) 5250,3120 5305.5,3064.5 5358.43,3064.5 5384.5,3038.43 5384.5,3003.13 5506,2881.63 5506,2864 v1(5525,2845)
  Bottom Layer w10: U1.12@5131.62,3055.41 5177.71,3101.5 5186.81,3101.5 5205.31,3120 v1(5220,3120) ; v1(5525,2845) 5525,2825.3 5533.5,2816.8 5533.5,2799.13 5615,2717.63 5615,2500 P21.1@5640,2475
SCK: P5.2 P20.3 U1.20 U6.5 U8.5 U10.5 U12.5 U14.5 U16.5 | length 7586.6
  Top Layer w10: U6.5@3320.59,2501.89 3320.59,2464.41 3341,2444 3396.63,2444 3416,2463.37 3416,2518.37 3499.41,2601.78 U10.5@3499.41,2658.11 3499.41,2789.15 3548.75,2838.5 3861.5,2838.5 3878.5,2821.5 3916.5,2821.5 3943.5,2848.5 4016.8,2848.5 4033.5,2831.8 4033.5,2811.8 4080,2765.3 v1(4080,2745) ; U14.5@3644.41,3983.11 3644.41,3915.59 v1(3660,3900) ; U12.5@3964.41,2643.11 3964.41,2719.15 3990.25,2745 v1(4080,2745) ; U16.5@3999.41,3988.11 3999.41,3910.59 v1(4015,3895) ; U8.5@4336.89,2464.41 4332.8,2468.5 4261.5,2468.5 4235,2495 ; v1(4925,3935) 4932.63,3935 4959.13,3908.5 5006.75,3908.5 5048.5,3866.75 5048.5,3729.38 5183,3594.88 5183,3339.81 5150,3306.81 5150,3275 v1(5090,3215) 5011.5,3136.5 5011.5,2878.2 5012,2877.7 5012,2646.75 5000,2634.75 5000,2610 P5.2@5045,2565 5044.19,2565 4953.19,2474 4729,2474 4593,2338 4496.75,2338 4454.87,2379.87 4402.5,2379.87 4386.63,2364 4268.07,2364 4226.5,2405.57 4226.5,2451.8 4235,2460.3 4235,2495 ; v1(5040,2400) 5040,2399.7 5059.69,2380 5202.63,2380 5236,2346.63 5236,2221.63 5322.67,2134.95 5722.33,2134.95 5804,2216.63 5804,2404 P20.3@5875,2475 ; v1(4080,2745) 4155,2745 4235,2665 4235,2495
  Bottom Layer w10: v1(3660,3900) 3695,3865 3860,3865 3900,3905 v1@4015,3905 ; v1(4015,3895) 4020,3900 4050,3870 4675,3870 4756,3951 4866.63,3951 4882.63,3935 v1(4925,3935) ; U1.20@5020.27,3166.76 5065,3211.5 5086.5,3211.5 v1(5090,3215) ; v1(5040,2400) 5040,2560 P5.2@5045,2565
SCL: I2C.1 MS1.1 U1.43 | length 1375.2
  Bottom Layer w8: I2C.1@5810,3970 5943.27,3836.73 MS1.1@5943.27,3648.82
  Bottom Layer w10: U1.43@5187.3,3560.68 5144,3603.98 5144,3634 5201.5,3691.5 5201.81,3691.5 5218.5,3708.2 5218.5,3708.5 5259.83,3749.83 5314.77,3749.83 5330.44,3765.5 5417.96,3765.5 5433.63,3749.83 5742.2,3749.83 5749,3756.63 5749,3909 I2C.1@5810,3970
SDA: I2C.2 MS1.7 U1.44 | length 1297.6
  Bottom Layer w8: MS1.7@5726.73,3599.61 5774.61,3599.61 5860,3685 5860,3850 5820,3890 I2C.2@5810,3890
  Bottom Layer w10: U1.44@5201.22,3574.6 5160,3615.82 5160,3627.37 5208.13,3675.5 5208.43,3675.5 5234.5,3701.57 5234.5,3701.87 5266.45,3733.83 5321.4,3733.83 5337.07,3749.5 5411.33,3749.5 5427.01,3733.83 5748.83,3733.83 5765,3750 5765,3845 I2C.2@5810,3890
SW1: P6.2 U1.46 | length 356.7
  Top Layer w10: P6.2@5219.69,3792.32 5219.69,3782.69 5237.87,3764.5 5238.13,3764.5 5315,3687.63 v1(5315,3585)
  Bottom Layer w8: U1.46@5229.06,3602.44 5266.5,3565 5295,3565 v1(5315,3585)
SW2: P7.2 U1.45 | length 541.9
  Top Layer w10: v1(5509.85,3705.15) 5510.15,3705.15 5549.69,3744.68 P7.2@5549.69,3792.32
  Bottom Layer w10: U1.45@5215.14,3588.52 5179.46,3624.2 5214.75,3659.5 5215.06,3659.5 5250.5,3694.94 5250.5,3695.25 5273.08,3717.83 5328.02,3717.83 5343.7,3733.5 5404.7,3733.5 5433.05,3705.15 v1(5509.85,3705.15)
TX0: D1.2 U1.3 | length 1451.6
  Top Layer w8: v1(4980,3685) 5003.79,3685 5120,3568.79 5120,3455 5095,3430 D1.2@5058.15,3430
  Top Layer w10: v1(5190,3720) 5200,3720 5250,3670 5250,3325 v1(5260,3315)
  Bottom Layer w8: v1(4980,3685) 4980,3697.07 4988.43,3705.5
  Bottom Layer w10: 4988.43,3705.5 4989.43,3706.5 5176.5,3706.5 v1(5190,3720) ; U1.3@5256.9,2930.13 5284,2957.24 5284,3291 v1(5260,3315)
TX1: P21.2 U1.13 | length 1090.8
  Top Layer w10: v1(5175,3130) 5175,3105 5190,3090 5255,3090 5296.5,3048.5 5351.81,3048.5 5368.5,3031.8 5368.5,2996.5 5490,2875 5490,2820 v1(5505,2805)
  Bottom Layer w10: U1.13@5117.7,3069.33 5175,3126.63 v1(5175,3130) ; v1(5505,2805) 5595,2715 5595,2425 5623.74,2396.26 P21.2@5640,2396.26
VOLTAGEMONITOR: C71.2 R70.2 R71.2 U1.88 | length 1160.6
  Top Layer w8: v1(5965,3020) 5990,3020 6012.05,3042.05 6012.05,3462.01 5966.5,3507.56 R70.2@5966.5,3600 R71.2@5966.5,3665
  Bottom Layer w8: U1.88@5539.46,3069.33 5608.8,2999.99 5889.99,2999.99 5910,3020 v1(5965,3020)
pads on no net: H1.1 H1.7 H1.10 H1.16 H1.19 H1.28 H1.31 H2.1 H2.7 H2.10 H2.16 H2.19 H2.28 H2.31 MS1.4 MS1.8 S1.1 S1.2 S2.1 S2.2 S3.1 S3.2 U1.29 U1.33 U1.34 U1.47 U1.48 U1.49 U1.50 U1.60 U1.65 U1.66 U1.67 U1.68 U1.69 U1.70 U1.71 U1.72 U1.73 U1.74 U1.75 U1.76 U1.79 U1.89 U1.90 U1.97 U4.7 UXBEE.4 UXBEE.5 UXBEE.6 UXBEE.7 UXBEE.8 UXBEE.9 UXBEE.11 UXBEE.12 UXBEE.13 UXBEE.14 UXBEE.15 UXBEE.16 UXBEE.18 UXBEE.19 UXBEE.20 X2.1 X2.3 X3.1 X3.3 X4.1 X4.3 X5.1 X5.3 X6.1 X6.3 X7.1 X7.3
copper on no net:
  other v7: 5700,2635 2845,3295

## Polygon pours and split planes (outlines as drawn)
GND on Top Layer "GND_POUR" (solid, remove dead copper, shelved, pour order 12): 3740,3285 3845,3285 3845,3180 3740,3180 3740,3285
GND on Top Layer "GND_POUR" (solid, remove dead copper, shelved, pour order 11): 3685,2765 3785,2765 3785,2660 3685,2660 3685,2765
GND on Top Layer "GND_POUR" (solid, remove dead copper, shelved, pour order 9): 2905,2500 3150,2500 3150,2260 3145,2255 2905,2255 2905,2500
no net on Top Layer "GND_POUR" (solid, remove dead copper, shelved, pour order 8): 4141.69,3261.69 4386.69,3261.69 4386.69,3021.69 4381.69,3016.69 4141.69,3016.69 4141.69,3261.69
GND on Top Layer "GND" (solid, remove dead copper, shelved, pour order 10): 4140,3260 4385,3260 4385,3016.54 4381.54,3020 4140,3020 4140,3260
GND on Bottom Layer "GND_POUR" (solid, remove dead copper, shelved, pour order 7): 2765,4065 2770,4060 6000,4060 6000,2110 6005,2105 5990,2120 2765,2120 2765,4070
12V on Power (split plane): 5519.91,3350.82 5519.91,3344.18 5485.82,3310.09 5455,3310.09 5452.39,3309.74 5449.96,3308.74 5447.87,3307.13 5320.37,3179.63 5240.82,3100.09 5185,3100.09 5182.39,3099.74 5179.96,3098.74 5177.87,3097.13 5160.82,3080.09 4954.18,3080.09 4925.09,3109.18 4925.09,3125.82 4949.18,3149.91 4975.82,3149.91 4987.87,3137.87 4989.96,3136.26 4992.39,3135.26 4995,3134.91 5135,3134.91 5137.61,3135.26 5140.04,3136.26 5142.13,3137.87 5164.18,3159.91 5265,3159.91 5267.61,3160.26 5270.04,3161.26 5272.13,3162.87 5324.63,3215.37 5326.23,3217.46 5327.24,3219.89 5327.59,3222.5 5327.59,3258.32 5414.18,3344.91 5450,3344.91 5452.61,3345.26 5455.04,3346.26 5457.13,3347.87 5479.18,3369.91 5500.82,3369.91
12V on Power (split plane): 2984.91,3810.82 2984.91,3235 2985.26,3232.39 2986.26,3229.96 2987.87,3227.87 3052.87,3162.87 3054.96,3161.26 3056.17,3160.76 3057.39,3160.26 3060,3159.91 3429.57,3159.91 3446.62,3142.87 3448.71,3141.26 3451.14,3140.26 3453.75,3139.91 4005,3139.91 4007.61,3140.26 4010.04,3141.26 4012.13,3142.87 4029.18,3159.91 4145,3159.91 4145,3035 4380,3035 4380,3159.91 4590.82,3159.91 4619.91,3130.82 4619.91,2944.18 4553.3,2877.56 4233.13,2877.56 4230.35,2880.35 4228.78,2881.55 4228.03,2881.86 4226.96,2882.31 4225,2882.56 4145,2882.56 4143.04,2882.31 4141.23,2881.56 3642.52,2881.56 3640.71,2882.31 3638.75,2882.56 3336.57,2882.56 3335.04,2883.74 3332.61,2884.74 3330,2885.09 3327.39,2884.74 3324.96,2883.74 3322.87,2882.13 3302.87,2862.13 3301.26,2860.04 3300.26,2857.61 3299.91,2855 3299.91,2671.25 3300.26,2668.64 3301.26,2666.21 3302.87,2664.12 3334.91,2632.07 3334.91,2342.93 3277.87,2285.88 3276.26,2283.79 3275.26,2281.36 3274.91,2278.75 3274.91,2145 3274.91,2125.1 2785.1,2125.1 2785.1,3874.91 2920.82,3874.91
5V on Power (split plane): 6004.9,2125.1 3295.09,2125.1 3295.09,2145 3295.09,2274.57 3352.13,2331.62 3353.74,2333.71 3354.74,2336.14 3355.09,2338.75 3355.09,2636.25 3354.74,2638.86 3353.74,2641.29 3352.13,2643.38 3320.09,2675.43 3320.09,2850.82 3336.7,2867.44 3638.75,2867.44 3640.71,2867.69 3642.52,2868.44 4141.23,2868.44 4143.04,2867.69 4145,2867.44 4221.87,2867.44 4224.65,2864.65 4226.22,2863.45 4228.04,2862.69 4230,2862.44 4553.43,2862.44 4554.96,2861.26 4557.39,2860.26 4560,2859.91 4562.61,2860.26 4565.04,2861.26 4567.13,2862.87 4637.13,2932.87 4638.73,2934.96 4639.45,2936.68 4639.74,2937.39 4640.09,2940 4640.09,3135 4639.74,3137.61 4638.73,3140.04 4637.13,3142.13 4602.13,3177.13 4600.04,3178.74 4597.61,3179.74 4595,3180.09 4380,3180.09 4380,3260 4145,3260 4145,3180.09 4025,3180.09 4022.39,3179.74 4019.96,3178.74 4017.87,3177.13 4000.82,3160.09 3457.93,3160.09 3440.88,3177.13 3438.79,3178.74 3436.36,3179.74 3433.75,3180.09 3064.18,3180.09 3005.09,3239.18 3005.09,3815 3004.74,3817.61 3004.45,3818.32 3003.74,3820.04 3002.13,3822.13 2932.13,3892.13 2930.04,3893.74 2927.61,3894.74 2925,3895.09 2785.1,3895.09 2785.1,4049.9 6004.9,4049.9
GND on GND (split plane): 6004.9,2125.1 2785.1,2125.1 2785.1,4049.9 6004.9,4049.9

## Keep-outs
Keep-Out Layer:
  the board outline again, w5.91

## Other copper
Top Layer:
  region net GND: 2807.99,3640.67 2807.99,3500.67 2967.99,3500.67 2967.99,3640.67
  region net GND: 3346.34,3495.63 3486.34,3495.63 3486.34,3655.63 3346.34,3655.63
  region net GND: 3383.31,3293.35 3383.31,3153.35 3543.31,3153.35 3543.31,3293.35
Bottom Layer:
  region net GND: 3035,3600 3125,3600 3125,3515 3035,3515
Power (plane layer: these items are gaps in the copper):
  pour cut-out: 3745,3280 3835,3280 3835,3195 3745,3195
  pour cut-out: 4145,3260 4380,3260 4380,3035 4145,3035
  pour cut-out: 2908.31,2498.31 3143.31,2498.31 3143.31,2273.31 2908.31,2273.31
  pour cut-out: 3686.69,2761.69 3776.69,2761.69 3776.69,2676.69 3686.69,2676.69
  lines w13: 3638.75,2875 4145,2875
  lines w15: 3330,2875 3638.75,2875 ; 4145,2875 4225,2875 4230,2870 4251.25,2870 4560,2870
  lines w20: 2780,3885 2925,3885 2995,3815 2995,3235 3060,3170 3433.75,3170 3453.75,3150 4005,3150 4025,3170 4181.25,3170 4555,3170 4595,3170 4630,3135 4630,2940 4560,2870 ; 3285,2120 3285,2145 3285,2278.75 3345,2338.75 3345,2636.25 3310,2671.25 3310,2855 3330,2875 ; 4915,3105 4915,3130 4945,3160 4980,3160 4995,3145 5135,3145 5160,3170 5265,3170 5317.5,3222.5 5317.5,3262.5 5410,3355 5450,3355 5475,3380 5505,3380 5530,3355 5530,3340 5490,3300 5455,3300 5327.5,3172.5 5245,3090 5185,3090 5165,3070 4975,3070 4950,3070 4915,3105

## Silkscreen, mask and mechanical layers (free items; w line width, h text height)
Top Overlay:
  circle w10: c5705,2630 r106.3
  lines w10: 2774.73,3360.09 cw(c2841.77,3295.32) 2775.13,3230.13
  text "HOT" at 3715,3195 h60
  text "HOT" at 4184.29,3108.31 h60
  text "HOT" at 3695,2685 h60
  text "HOT" at 2935,2350 h60
Bottom Solder:
  lines w10: 3035,3515 3125,3515 3125,3600 3035,3600 3035,3515